# Altium PCB circle.PcbDoc
Units mil, origin at the board's own origin, x right, y up, seen from the top; angles counter-clockwise.
Board outline 1650 x 1650 mil, 2 copper layers (Top Layer, Bottom Layer); 32 components, 33 nets, 260 pads, 0 vias.
Unrouted connection lines stored in the file: 117.
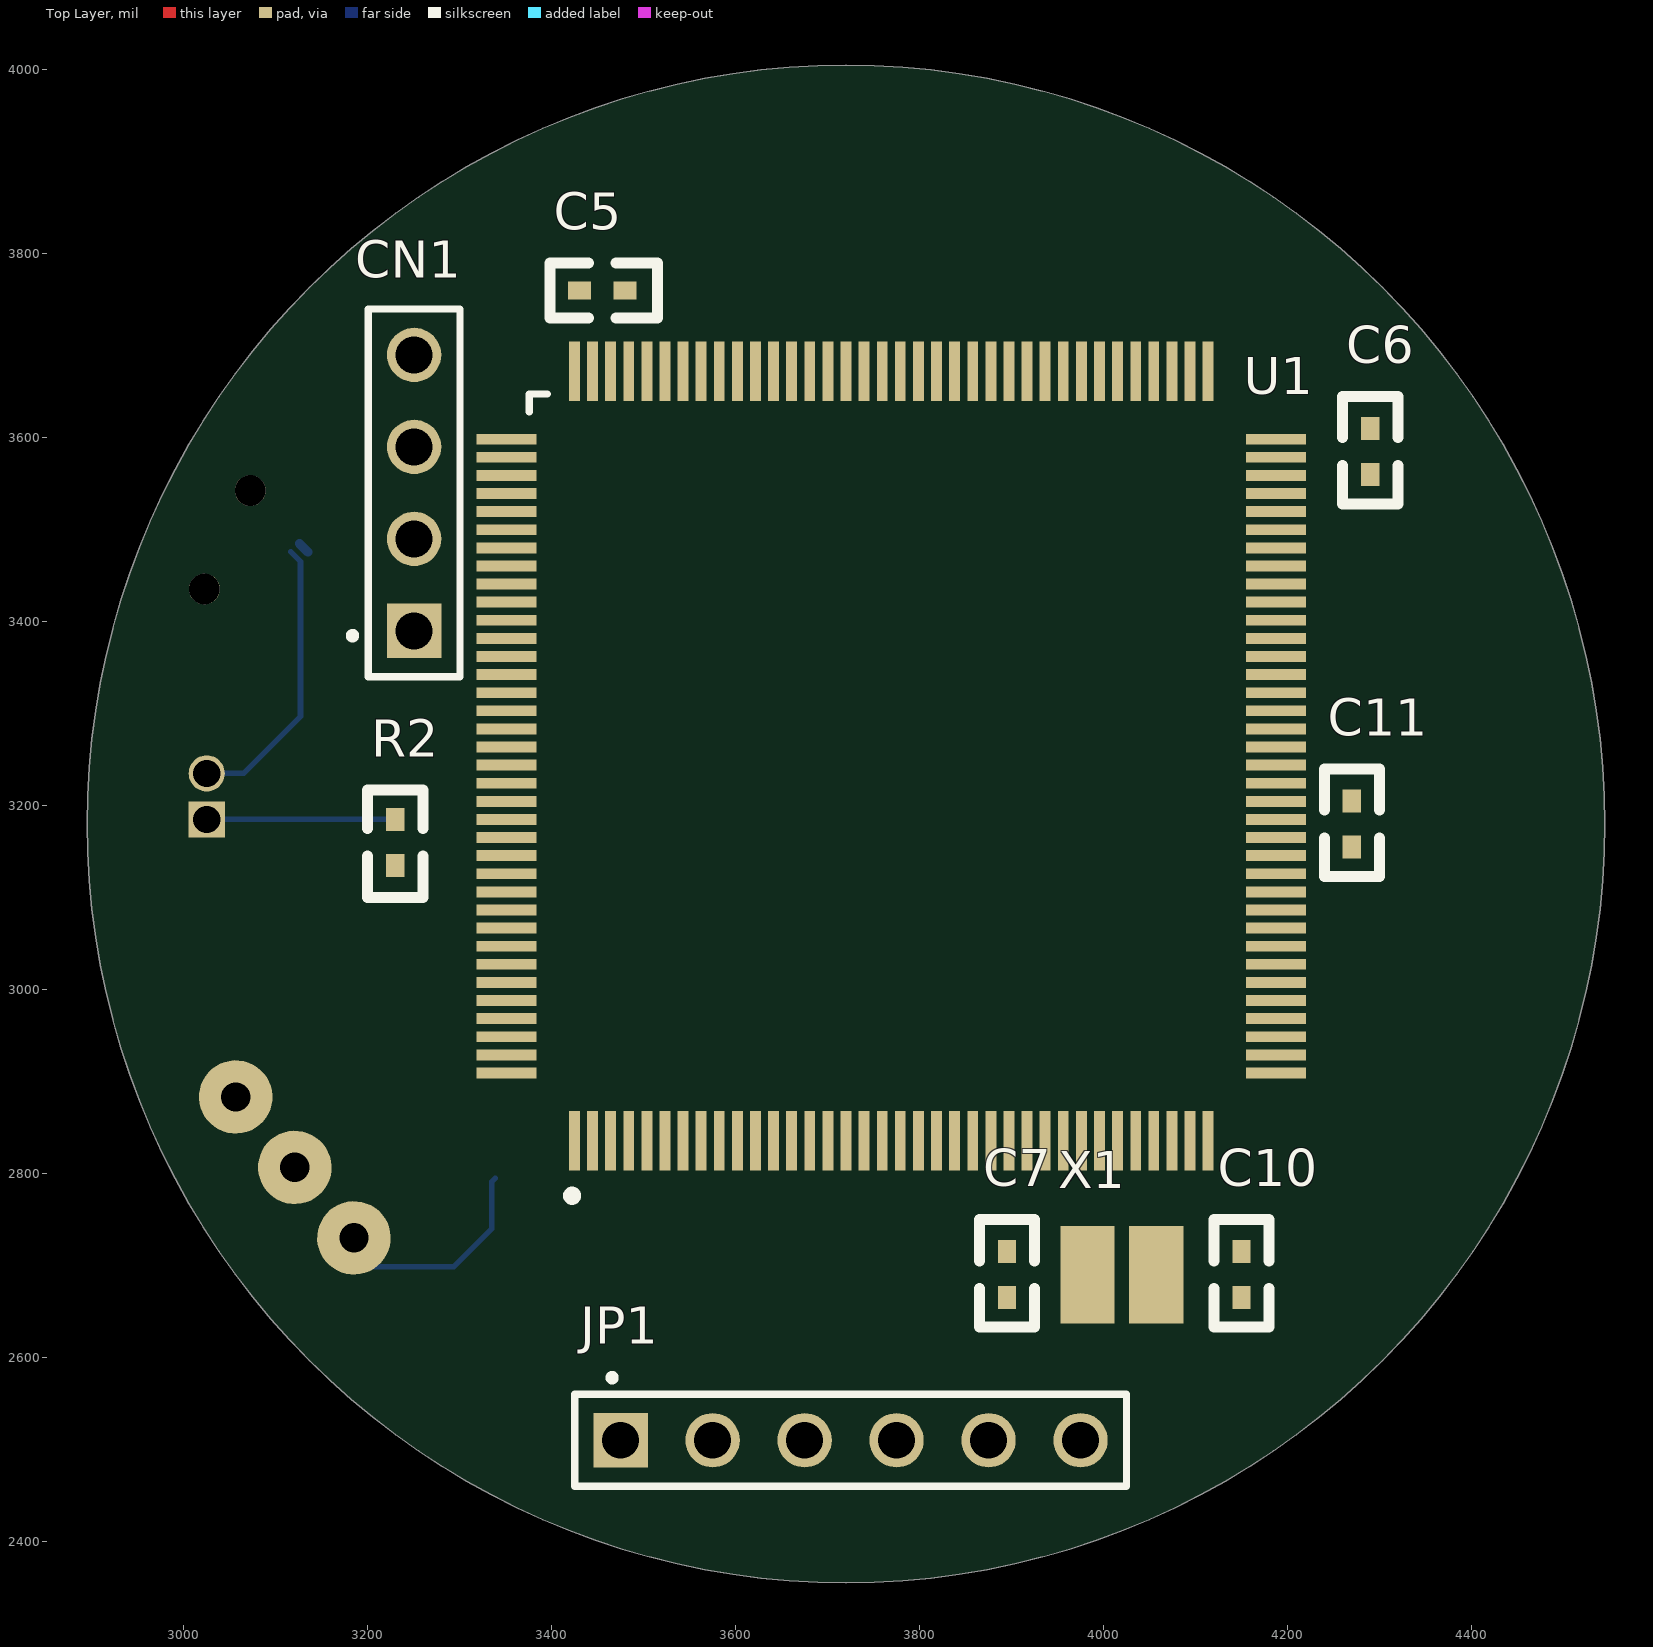
[diagram p0: Top Layer view]
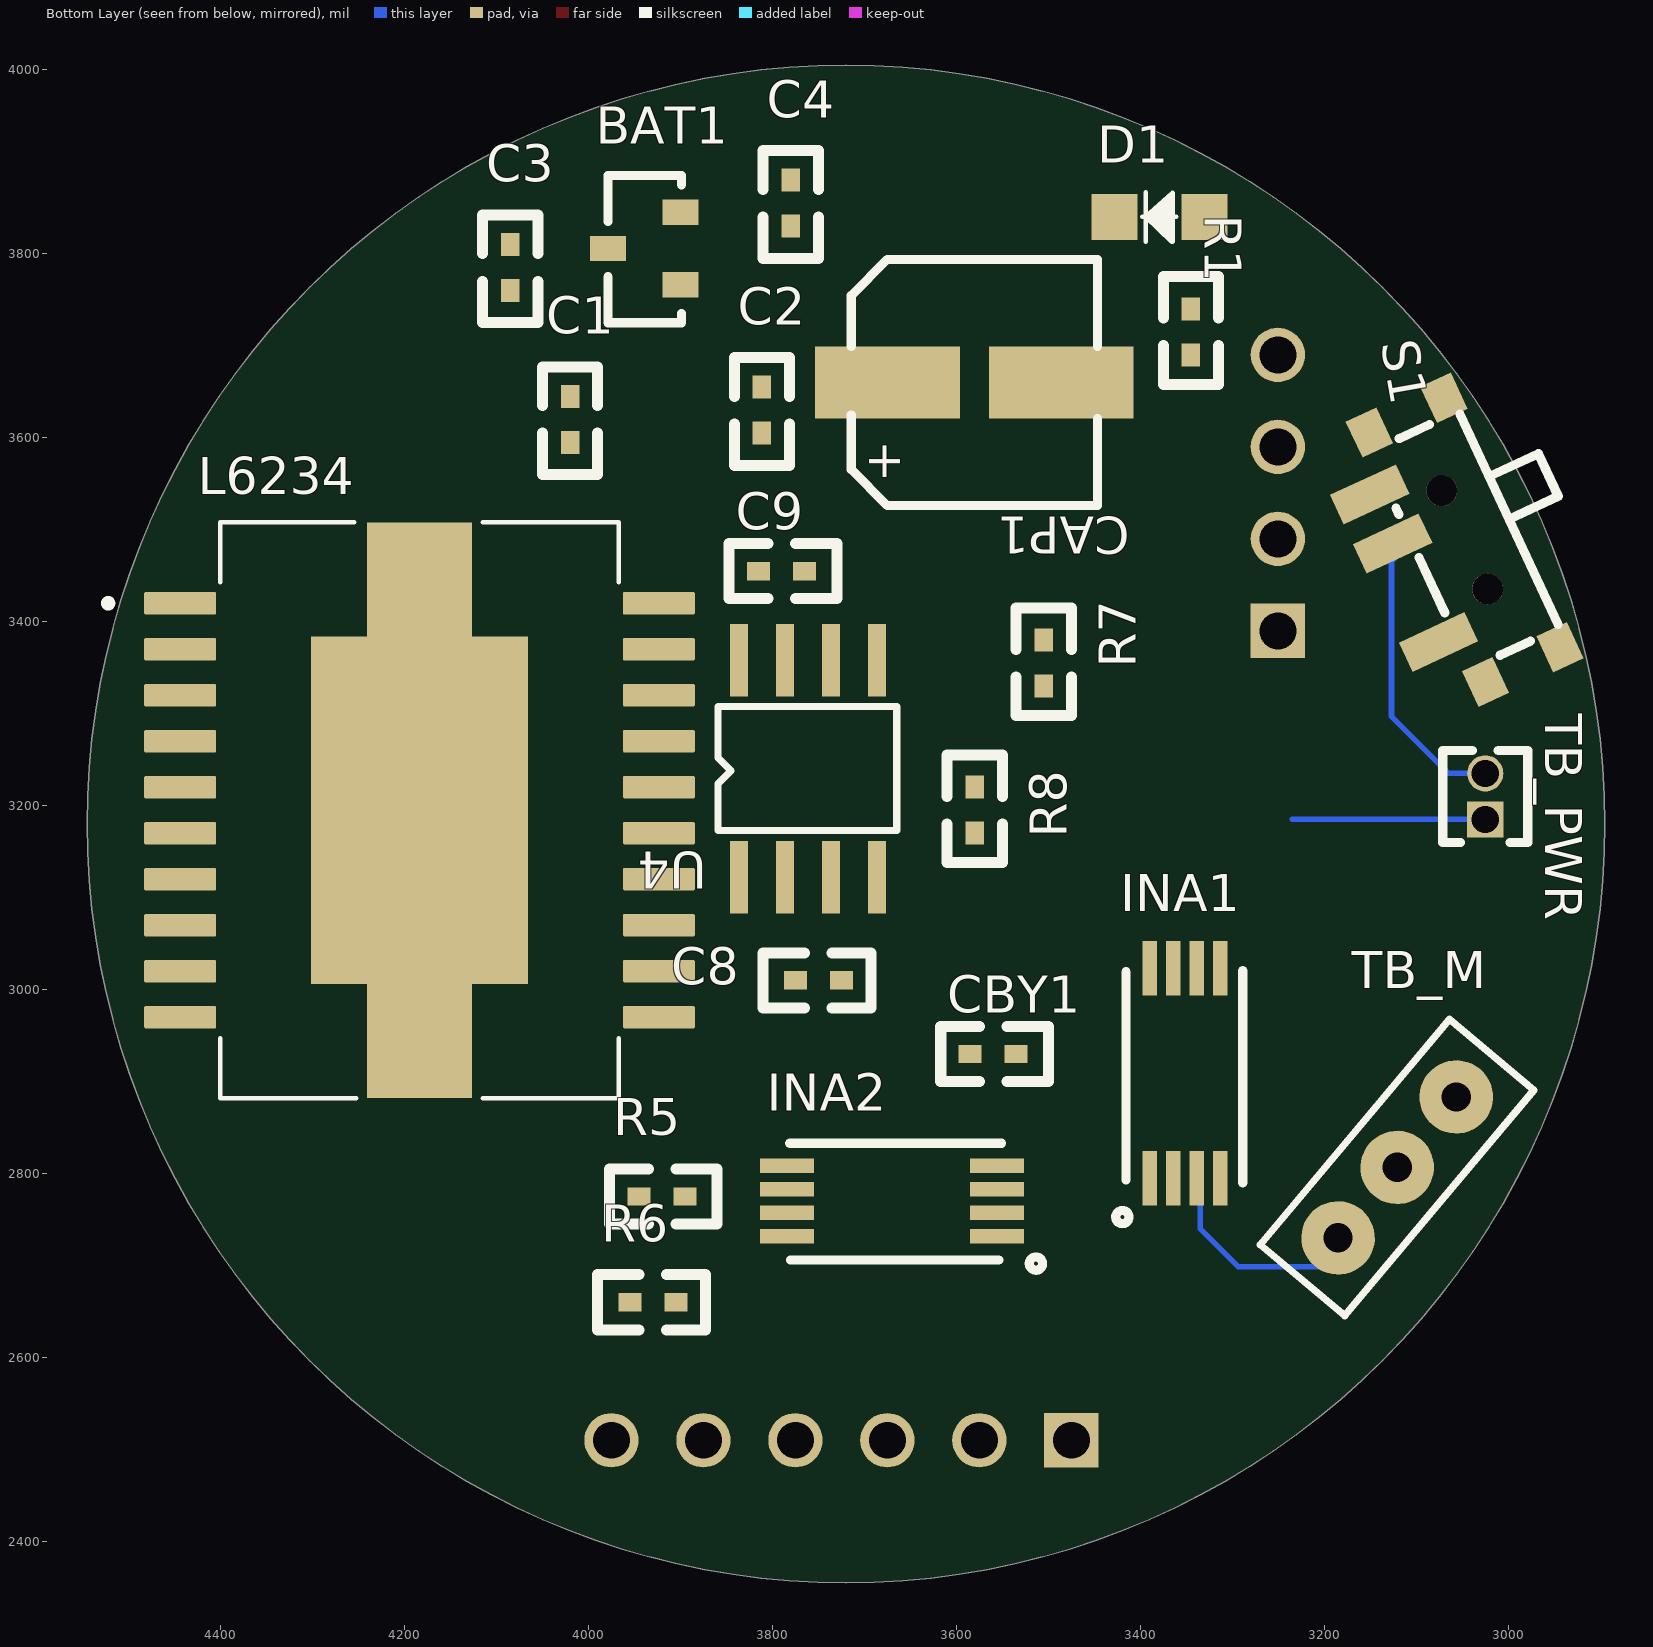
[diagram p1: Bottom Layer view, seen from below]

## Layer stack, top to bottom
Top Solder: solder mask 0.4, Solder Resist, Dk 3.5
Top Layer: signal copper 1.4
Dielectric 1: dielectric 12.6, FR-4, Dk 4.8
Bottom Layer: signal copper 1.4
Bottom Solder: solder mask 0.4, Solder Resist, Dk 3.5

## Board outline
2895,3180 ccw(c3720,3180) 3720,2355 ccw(c3720,3180) 4545,3180 ccw(c3720,3180) 3720,4005 ccw(c3720,3180)

## Design rules (kind name [scope] priority, off if disabled: settings)
Clearance [All] p1: gap=5 ignorepadtopadclearanceinfootprint=TRUE
MinimumSolderMaskSliver [All] p1: minsoldermaskwidth=0
PolygonConnect [All] p1: connectstyle=Relief reliefconductorwidth=10 reliefentries=4 polygonreliefangle="90 Angle" airgapwidth=10
RoutingVias [All] p1: holewidth=8 width=12 viastyle="Through Hole" minholewidth=8 minwidth=12 maxholewidth=8 maxwidth=12
SolderMaskExpansion [All] p1: expansion=4
Width Width_1 [All] p1: maxlimit=6 minlimit=6 preferedwidth=6
29 further rules are at their usual default settings.

## Components (designator, comment, footprint, x,y, rotation, side; value= is the part's Value field where it differs from the comment)
BAT1 "BAT54S" BAT54s 3978.74,3845 r180 bottom
C1 "100nF" 0402 4020,3595 r90 bottom
C2 "10nF" 0402 3811.42,3605 r90 bottom
C3 "1μF" 0402 4085,3760 r90 bottom
C4 "220nF" 0402 3780,3830 r90 bottom
C5 "1μF" 0402 3480,3760 r180 top
C6 "1μF" 0402 4290,3610 r270 top
C7 "4.3pF" 0402 3895,2715 r270 top
C8 "100nF" 0402 3775,3010 r180 bottom
C9 "1μF" 0402 3765,3455 r0 bottom
C10 "4.3pF" 0402 4150,2715 r270 top
C11 "100nF" 0402 4270,3205 r270 top
CAP1 "EEH-ZA1E101XP" EEH-ZA1E101XP 3446.65,3793.86 r0 bottom
CBY1 "0.1μF" 0402 3535,2930 r0 bottom
CN1 "SWD" HDR_1x4_2R54_V_M 3250.47,3390 r90 top
D1 "LED" D0805+ 3330,3840 r0 bottom
INA1 "INA240A1" INA240 3351.61,2909.17 r180 bottom
INA2 "INA240A2" INA240 3670,2770 r90 bottom
JP1 "SPI1" HDR_1x6_2R54_V_M 3475,2510 r0 top
L6234 "L6234PD013TR" SOIC127P1420X360-21N 4183.63,3195 r180 bottom
R1 "2K" 0402 3345,3740 r270 bottom
R2 "10K" 0402 3230,3135 r90 top
R5 "10mOhm" 0402 3895,2775 r0 bottom
R6 "10mOhm" 0402 3955,2660 r180 bottom value=1K
R7 "4.7KOhm" 0402 3505,3380 r270 bottom
R8 "4.7kOhm" 0402 3580,3220 r270 bottom
S1 "" SW-SMD_G-SWITCH_MK-12C02-G015 3045,3490 r65 bottom
TB_M "TB002-500-03BE" 10.7MHZ 3056.52,2883.21 r310 bottom
TB_PWR "TB002-500-02BE" HDR-TH_2P-P1.27-V-M 3025,3210 r90 bottom
U1 "MCU_LQFP144" LQFP144_0R5_SKT 3769.2,3253.85 r0 top
U4 "AS5600" "SOIC 8" 3761.42,3240 r90 bottom
X1 "NX3225GD-8M" OSC_2SM_3R2x2R5 4020,2690 r180 top

## Footprints (in the part's own frame and the unit in brackets; to place one, negate y for a bottom-side part, rotate by r counter-clockwise, add the part's x,y. Pads: shape width x height; smd on the part's side, far side on the other; paste and mask are expansions set on the pad)
10.7MHZ [mil]
  round 80 hole 32: 1(0,0) 2(200,0) 3(100,0)
  silkscreen extent -60,-60 260,60
0402 [mil]
  rect 25x20 smd: 1(0,0) 2(50,0)
  silkscreen extent -35,-30 82,30
BAT54s [mm]
  rect 1x0.7 smd: 1(2,-2) 2(2,0) 3(0,-1)
  silkscreen extent 0,-3.05 2.03,1.02, body extent -0.46,-2.48 2.46,0.44, height 1
D0805+ [mil]
  rect 50x50 smd: A(0,0) K(98,0)
  silkscreen extent 31,-27 68,27
EEH-ZA1E101XP [mm]
  rect 4x2 smd: 1(1,3.4) 2(5.8,3.4)
  silkscreen extent 0,0 6.8,6.8, body extent -0.3,0.2 7,6.8, height 7.7
HDR-TH_2P-P1.27-V-M [mm]
  rect 1x1 hole 0.75: 1(-0.635,0)
  round 1 hole 0.75: 2(0.635,0)
  silkscreen extent -1.27,-1.18 1.27,1.18
HDR_1x4_2R54_V_M [mm] "Male Header, Pitch 2.54mm, 4x1 Position, Mated Height 6mm, Tail Length 3mm"
  rect 1.5x1.5 hole 1.02: 1(0,0)
  round 1.5 hole 1.02: 2(2.54,0) 3(5.08,0) 4(7.62,0)
  silkscreen extent -1.27,-1.27 8.89,1.76, body extent -1.27,-1.27 8.89,1.27, height 9
HDR_1x6_2R54_V_M [mm] "Male Header, Pitch 2.54mm, 6x1 Position, Mated Height 6mm, Tail Length 3mm"
  rect 1.5x1.5 hole 1.02: 1(0,0)
  round 1.5 hole 1.02: 2(2.54,0) 3(5.08,0) 4(7.62,0) 5(10.16,0) 6(12.7,0)
  silkscreen extent -1.27,-1.27 13.97,1.79, body extent -1.27,-1.27 13.97,1.27, height 9
INA240 [mm]
  rect 0.4x1.5 smd mask+0.05: 1(-0.975,-2.9) 2(-0.325,-2.9) 3(0.325,-2.9) 4(0.975,-2.9) 5(0.975,2.9) 6(0.325,2.9) 7(-0.325,2.9) 8(-0.975,2.9)
  silkscreen extent -1.91,-4.16 1.6,2.83, body extent -1.5,-3.3 1.5,3.3, height 1.2
LQFP144_0R5_SKT [mm] "32-bit MCU ARM-based Cortex-M3 20 X 20mm, 0.5mm Pitch, 1.6mm Max thickness"
  rect 0.3x1.65 smd: 1(-8.75,-10.625) 2(-8.25,-10.625) 3(-7.75,-10.625) 4(-7.25,-10.625) 5(-6.75,-10.625) 6(-6.25,-10.625) 7(-5.75,-10.625) 8(-5.25,-10.625) 9(-4.75,-10.625) 10(-4.25,-10.625) 11(-3.75,-10.625) 12(-3.25,-10.625) 13(-2.75,-10.625) 14(-2.25,-10.625) 15(-1.75,-10.625) 16(-1.25,-10.625) 17(-0.75,-10.625) 18(-0.25,-10.625) 19(0.25,-10.625) 20(0.75,-10.625) 21(1.25,-10.625) 22(1.75,-10.625) 23(2.25,-10.625) 24(2.75,-10.625) 25(3.25,-10.625) 26(3.75,-10.625) 27(4.25,-10.625) 28(4.75,-10.625) 29(5.25,-10.625) 30(5.75,-10.625) 31(6.25,-10.625) 32(6.75,-10.625) 33(7.25,-10.625) 34(7.75,-10.625) 35(8.25,-10.625) 36(8.75,-10.625) 73(8.75,10.625) 74(8.25,10.625) 75(7.75,10.625) 76(7.25,10.625) 77(6.75,10.625) 78(6.25,10.625) 79(5.75,10.625) 80(5.25,10.625) 81(4.75,10.625) 82(4.25,10.625) 83(3.75,10.625) 84(3.25,10.625) 85(2.75,10.625) 86(2.25,10.625) 87(1.75,10.625) 88(1.25,10.625) 89(0.75,10.625) 90(0.25,10.625) 91(-0.25,10.625) 92(-0.75,10.625) 93(-1.25,10.625) 94(-1.75,10.625) 95(-2.25,10.625) 96(-2.75,10.625) 97(-3.25,10.625) 98(-3.75,10.625) 99(-4.25,10.625) 100(-4.75,10.625) 101(-5.25,10.625) 102(-5.75,10.625) 103(-6.25,10.625) 104(-6.75,10.625) 105(-7.25,10.625) 106(-7.75,10.625) 107(-8.25,10.625) 108(-8.75,10.625)
  rect 1.65x0.3 smd: 37(10.625,-8.75) 38(10.625,-8.25) 39(10.625,-7.75) 40(10.625,-7.25) 41(10.625,-6.75) 42(10.625,-6.25) 43(10.625,-5.75) 44(10.625,-5.25) 45(10.625,-4.75) 46(10.625,-4.25) 47(10.625,-3.75) 48(10.625,-3.25) 49(10.625,-2.75) 50(10.625,-2.25) 51(10.625,-1.75) 52(10.625,-1.25) 53(10.625,-0.75) 54(10.625,-0.25) 55(10.625,0.25) 56(10.625,0.75) 57(10.625,1.25) 58(10.625,1.75) 59(10.625,2.25) 60(10.625,2.75) 61(10.625,3.25) 62(10.625,3.75) 63(10.625,4.25) 64(10.625,4.75) 65(10.625,5.25) 66(10.625,5.75) 67(10.625,6.25) 68(10.625,6.75) 69(10.625,7.25) 70(10.625,7.75) 71(10.625,8.25) 72(10.625,8.75) 109(-10.625,8.75) 110(-10.625,8.25) 111(-10.625,7.75) 112(-10.625,7.25) 113(-10.625,6.75) 114(-10.625,6.25) 115(-10.625,5.75) 116(-10.625,5.25) 117(-10.625,4.75) 118(-10.625,4.25) 119(-10.625,3.75) 120(-10.625,3.25) 121(-10.625,2.75) 122(-10.625,2.25) 123(-10.625,1.75) 124(-10.625,1.25) 125(-10.625,0.75) 126(-10.625,0.25) 127(-10.625,-0.25) 128(-10.625,-0.75) 129(-10.625,-1.25) 130(-10.625,-1.75) 131(-10.625,-2.25) 132(-10.625,-2.75) 133(-10.625,-3.25) 134(-10.625,-3.75) 135(-10.625,-4.25) 136(-10.625,-4.75) 137(-10.625,-5.25) 138(-10.625,-5.75) 139(-10.625,-6.25) 140(-10.625,-6.75) 141(-10.625,-7.25) 142(-10.625,-7.75) 143(-10.625,-8.25) 144(-10.625,-8.75)
  silkscreen extent -10,-12.27 -8.69,10
OSC_2SM_3R2x2R5 [mm] "Crystal 8M Hz 3.2x2.5mm SMD"
  rect 1.5x2.7 smd: 1(-0.95,0) 2(0.95,0)
  body extent -1.6,-1.25 1.6,1.25, height 1
SOIC127P1420X360-21N [mm]
  rrect16% 1.99x0.63 smd: 1(-6.61,5.715) 2(-6.61,4.445) 3(-6.61,3.175) 4(-6.61,1.905) 5(-6.61,0.635) 6(-6.61,-0.635) 7(-6.61,-1.905) 8(-6.61,-3.175) 9(-6.61,-4.445) 10(-6.61,-5.715) 11(6.61,-5.715) 12(6.61,-4.445) 13(6.61,-3.175) 14(6.61,-1.905) 15(6.61,-0.635) 16(6.61,0.635) 17(6.61,1.905) 18(6.61,3.175) 19(6.61,4.445) 20(6.61,5.715)
  rect 6x9.6 smd paste-6: 21(0,0)
  rect 2.9x3.15 smd paste-3: 22(0,6.375) 23(0,-6.375)
  silkscreen extent -8.7,-7.95 5.5,7.95
"SOIC 8" [mm]
  rect 2x0.5 smd: 1(-2.993,1.905) 2(-2.993,0.635) 3(-2.993,-0.635) 4(-2.993,-1.905) 5(2.993,-1.905) 6(2.993,-0.635) 7(2.993,0.635) 8(2.993,1.905)
  silkscreen extent -1.71,-2.45 1.72,2.48
SW-SMD_G-SWITCH_MK-12C02-G015 [mm]
  rect 0.9x2 smd: 1(-2.25,1.912) 2(0.75,1.912) 3(2.25,1.912)
  rect 1.1x0.93 smd: 4(3.8,1.2) 5(3.8,-1.07) 6(-3.8,-1.07) 7(-3.8,1.2)
  round 0.85 hole 0.85 unplated: ""(-1.5,0.065) ""(1.5,0.065)
  silkscreen extent -3.3,-2.78 3.3,1.42

## Part data
BAT1: Supplier Part Number 1=512-BAT54S, Supplier 1=Mouser
C1 C2 C3 C4 C5 C6 C11 CBY1: library part CAP_1
C7 C8 C9 C10: library part CAP, "Capacitor"
CAP1: Supplier Part Number 1=667-EEH-ZA1E101XP, Supplier 1=Mouser
CN1: library part "Header 4", "Header, 4-Pin, Single row", Publisher="Altium Limited", Revision="17-Jul-2002: Re-released for DXP Platform."
INA1 INA2: library part INA240, Supplier Part Number 1=595-INA240A2PWR, Supplier 1=Mouser
JP1: library part "HEADER 6"
L6234: "Motor Driver BiCDMOS Parallel PowerSO-20", Package="SO-20 STMicroelectronics", Digi-Key_Part_Number=497-5352-1-ND, Digi-Key_Purchase_URL=https://www.digikey.com/product-detail/en/stmicroelectronics/L6234PD013TR/497-5352-1-ND/1154483?utm_source=snapeda&utm_medium=aggregator&utm_campaign=symbol, MF=STMicroelectronics, MP=L6234PD013TR, SnapEDA_Link=https://www.snapeda.com/parts/L6234PD013TR/STMicroelectronics/view-part/75337/?ref=snap
R1 R2: library part RES1
R5 R7 R8: library part RES2
R6: library part Res1, "Resistor", Ordered by=Subcon, Published=8-Jun-2000, Publisher="Altium Limited", Revision="July-2002: Re-released for DXP Platform."
S1: library part MK-12C02-G015
TB_M: Supplier Part Number 1=490-TB002-500-03BE, Supplier 1=Mouser
TB_PWR: Supplier Part Number 1=490-TB002-500-02BE, Supplier 1=Mouser
X1: library part XTAL, "Crystal Oscillator", LatestRevisionDate=17-Jul-2002, LatestRevisionNote="Re-released for DXP Platform.", PackageReference=R38, Published=8-Jun-2000, Publisher="Altium Limited"

## Nets (pads, with @x,y where several pads share a name; then routed paths per layer and width w, separated by ;. In a path a pad name is that pad's centre, name@x,y a point inside that pad or via, vN(x,y) a via of type N, cw(c..) or ccw(c..) an arc to the next point about the centre after c; other vN are vias at no path point)
+3.3: C8.1 C9.1 C11.1 CBY1.1 CN1.1 INA1.5 INA1.6 INA2.5 INA2.6 JP1.1 R7.2 R8.2 U1.6 U1.17 U1.25 U1.30 U1.32 U1.33 U1.39 U1.52 U1.62 U1.72 U1.84 U1.95 U1.108 U1.121 U1.131 U1.143 U1.144 U4.1 U4.2
GND: C1.2 C3.2 C5.2 C6.2 C7.2 C8.2 C9.2 C10.2 C11.2 CAP1.2 CBY1.2 CN1.4 D1.K INA1.1 INA1.4 INA1.7 INA2.1 INA2.4 INA2.7 JP1.6 L6234.1 L6234.2 L6234.10 L6234.11 L6234.19 L6234.20 L6234.21 L6234.22 L6234.23 R2.2 TB_PWR.1 U1.16 U1.31 U1.38 U1.51 U1.61 U1.83 U1.94 U1.107 U1.120 U1.130 U4.4 U4.5 U4.8 | length 210
  Bottom Layer w6: TB_PWR.1 3235,3185
NetBAT1_2: BAT1.2 C4.2 L6234.18
NetBAT1_3: BAT1.3 C2.1
NetC2_2: C2.2 L6234.17
NetC3_1: C3.1 L6234.16
NetC5_1: C5.1 U1.106
NetC6_1: C6.1 U1.71
NetC7_1: C7.1 U1.23 X1.2
NetC10_1: C10.1 U1.24 X1.1
NetCN1_2: CN1.2 U1.109
NetCN1_3: CN1.3 U1.105
NetD1_A: D1.A R1.2
NetINA1_2: INA1.2 L6234.5 R6.1
NetINA1_3: INA1.3 R6.2 TB_M.2 | length 223.7
  Bottom Layer w6: TB_M.2@3185.08,2698.4 3293.4,2698.4 3335,2740 3335,2791.18 INA1.3
NetINA1_8: INA1.8 U1.37
NetINA2_2: INA2.2 R5.2 TB_M.3
NetINA2_3: INA2.3 L6234.6 R5.1
NetINA2_8: INA2.8 U1.29
NetJP1_2: JP1.2 U1.18
NetJP1_3: JP1.3 U1.19
NetJP1_4: JP1.4 U1.20
NetJP1_5: JP1.5 U1.21
NetL6234_3: L6234.3 L6234.8 L6234.13 U1.13
NetL6234_4: L6234.4 U1.64
NetL6234_7: L6234.7 U1.60
NetL6234_14: L6234.14 U1.86
NetL6234_15: L6234.15 TB_M.1
NetR2_1: R2.1 U1.138
NetR7_1: R7.1 U1.139 U4.7
NetR8_1: R8.1 U1.140 U4.6
NetS1_2: S1.2 TB_PWR.2 | length 317.8
  Bottom Layer w6: TB_PWR.2@3030,3240 TB_PWR.2 3065,3235 3126.94,3296.94 3126.94,3465.32 S1.2@3116.5,3475.76
VCC1: BAT1.1 C1.1 C4.1 CAP1.1 L6234.9 L6234.12 R1.1 S1.3
pads on no net: S1. S1.1 S1.4 S1.5 S1.6 S1.7 U1.1 U1.2 U1.3 U1.4 U1.5 U1.7 U1.8 U1.9 U1.10 U1.11 U1.12 U1.14 U1.15 U1.22 U1.26 U1.27 U1.28 U1.34 U1.35 U1.36 U1.40 U1.41 U1.42 U1.43 U1.44 U1.45 U1.46 U1.47 U1.48 U1.49 U1.50 U1.53 U1.54 U1.55 U1.56 U1.57 U1.58 U1.59 U1.63 U1.65 U1.66 U1.67 U1.68 U1.69 U1.70 U1.73 U1.74 U1.75 U1.76 U1.77 U1.78 U1.79 U1.80 U1.81 U1.82 U1.85 U1.87 U1.88 U1.89 U1.90 U1.91 U1.92 U1.93 U1.96 U1.97 U1.98 U1.99 U1.100 U1.101 U1.102 U1.103 U1.104 U1.110 U1.111 U1.112 U1.113 U1.114 U1.115 U1.116 U1.117 U1.118 U1.119 U1.122 U1.123 U1.124 U1.125 U1.126 U1.127 U1.128 U1.129 U1.132 U1.133 U1.134 U1.135 U1.136 U1.137 U1.141 U1.142 U4.3
copper on no net: | length 13.2
  Bottom Layer w10: 3125.69,3484.96 3135,3475.65

## Silkscreen, mask and mechanical layers (free items; w line width, h text height)
Mechanical 1:
  circle w10: c3720,3180 r825

## Text inside footprints (layer, text, board x,y; h text height)
CAP1: Bottom Overlay "+" at 3694.68,3597.01 h40 r90